# Altium PCB stm8.PcbDoc
Units mm, origin at the board's own origin, x right, y up, seen from the top; angles counter-clockwise.
Board outline 34 x 58 mm, 2 copper layers (Top Layer, Bottom Layer); 19 components, 22 nets, 79 pads, 12 vias.
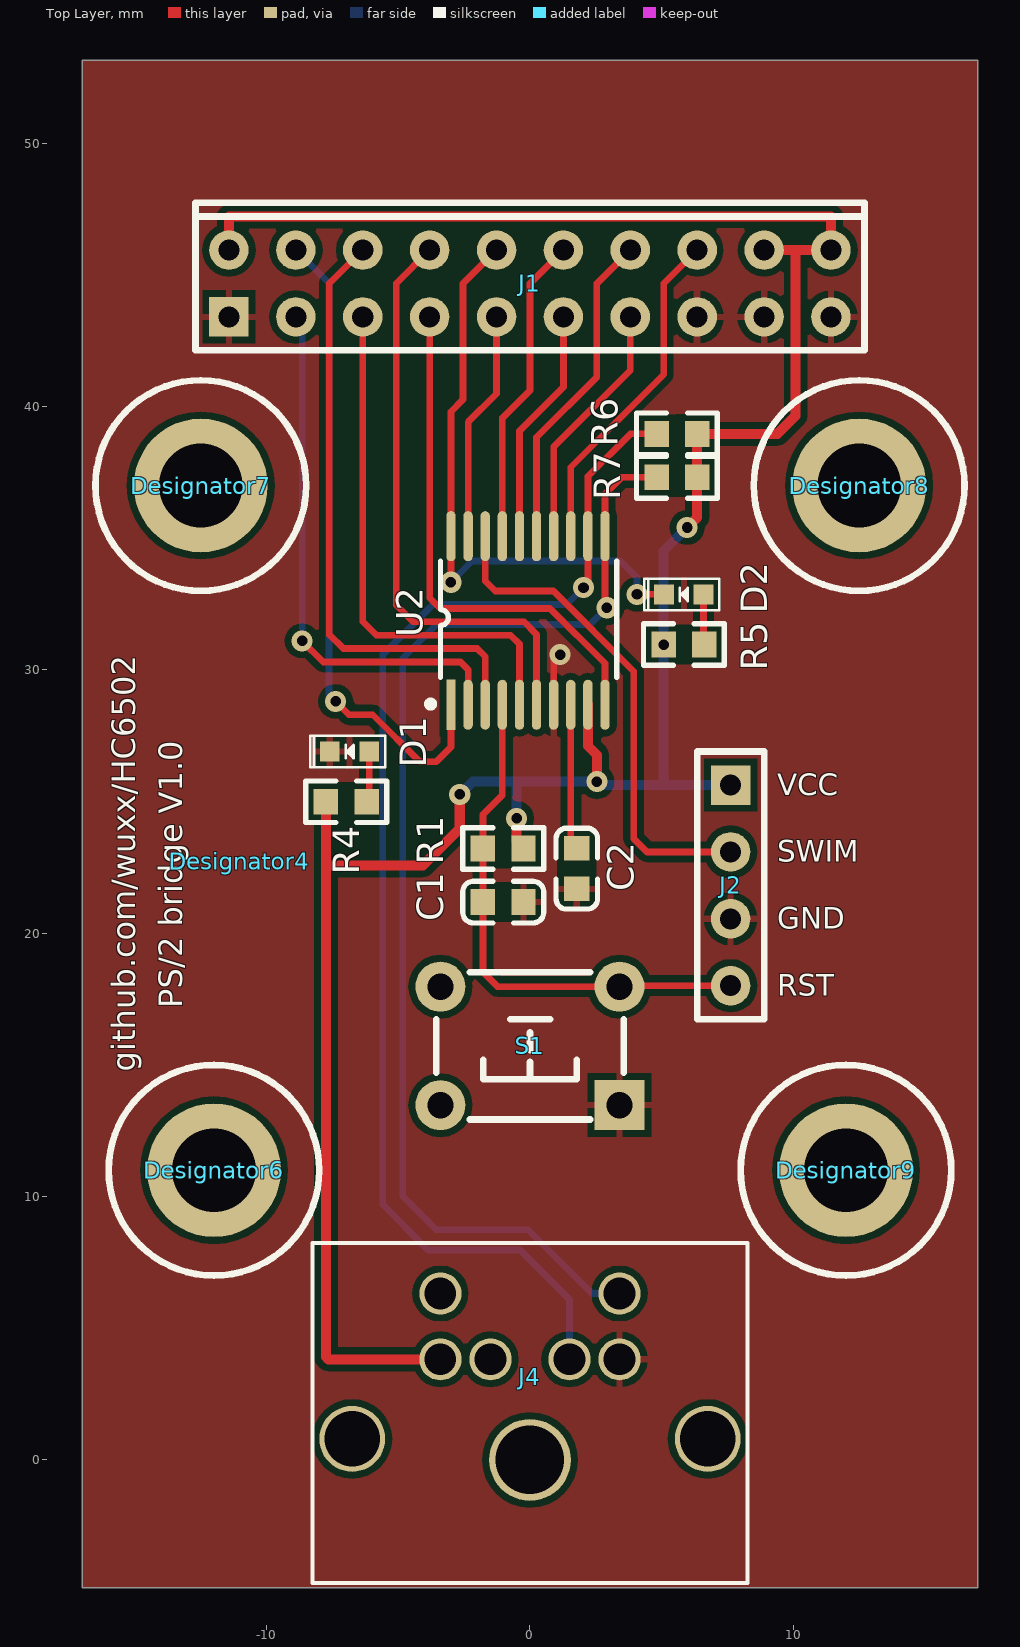
[diagram p0: Top Layer view]
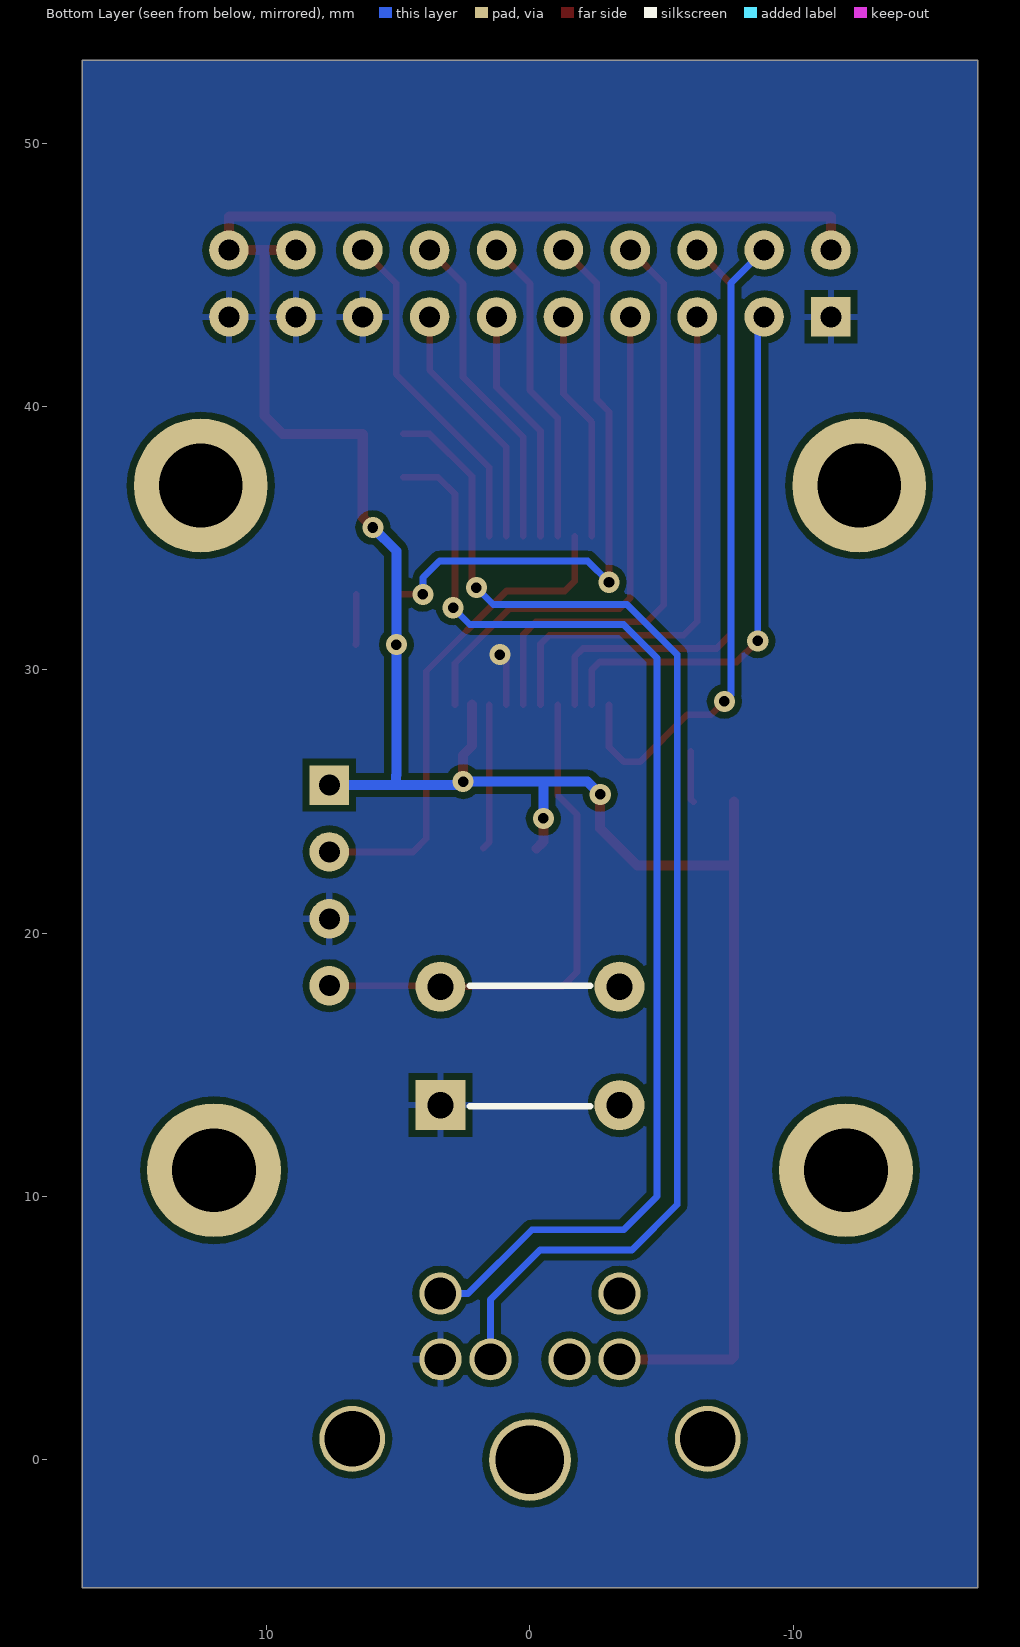
[diagram p1: Bottom Layer view, seen from below]
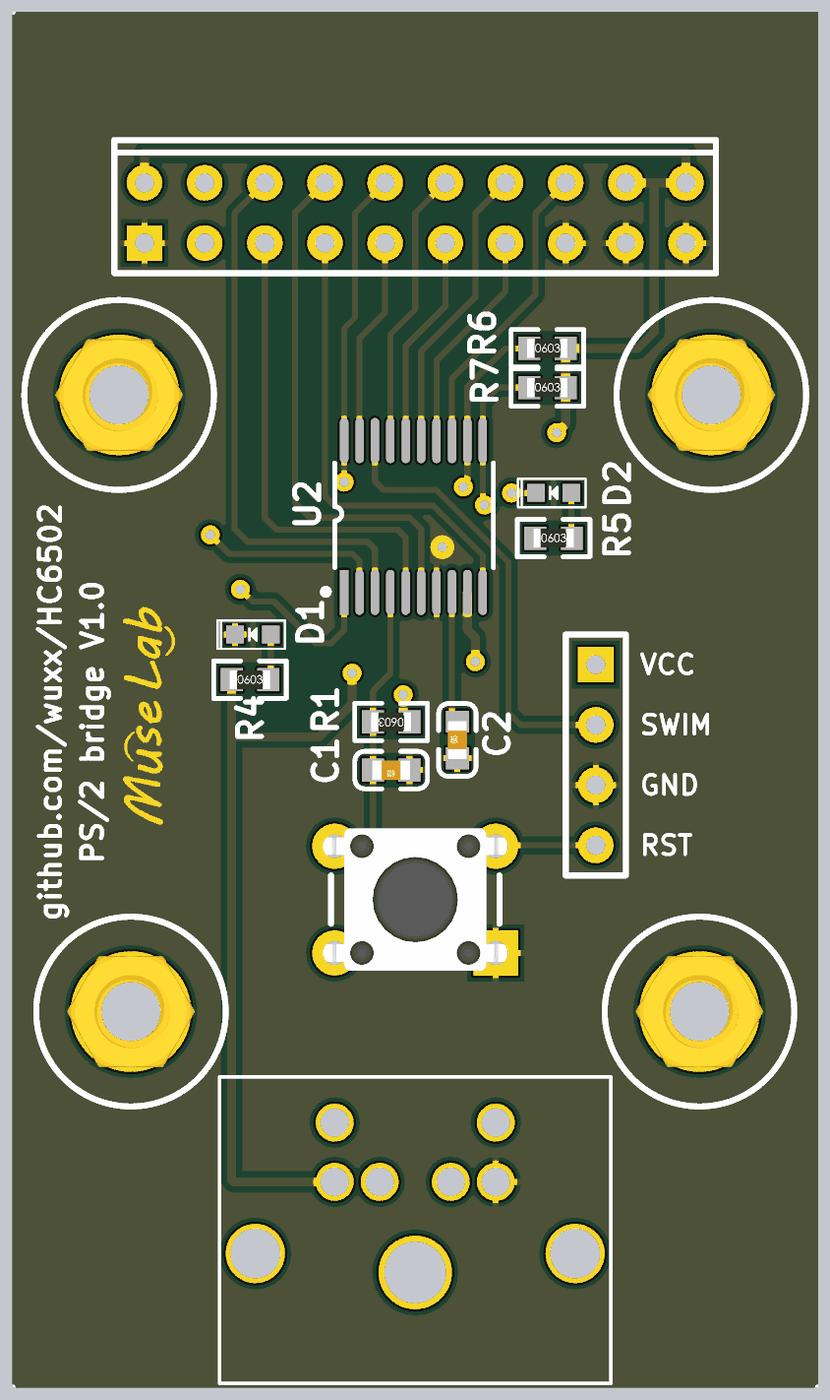
[diagram p2: 3D render of the assembled board from above, using the file's embedded part models]

## Layer stack, top to bottom
Top Solder: solder mask 0.0102, Solder Resist, Dk 3.5
Top Layer: signal copper 0.0356
Dielectric 1: dielectric 0.32, FR-4, Dk 4.8
Bottom Layer: signal copper 0.0356
Bottom Solder: solder mask 0.0102, Solder Resist, Dk 3.5

## Board outline
-17,-4.852 17,-4.852 17,53.148 -17,53.148

## Design rules (kind name [scope] priority, off if disabled: settings)
Clearance [All] p1: gap=0.254 ignorepadtopadclearanceinfootprint=FALSE except(0: Arc-Hole Track-Hole SMDPad-Hole THPad-Hole Via-Hole Fill-Hole Poly-Hole Region-Hole Text-Hole)
DiffPairsRouting [All] p1: maxlimit=0.254 minlimit=0.254 mostfreqgap=0.254 toplayer_minwidth=0.152 toplayer_maxwidth=0.381 toplayer_prefwidth=0.381 bottomlayer_minwidth=0.152 bottomlayer_maxwidth=0.381 bottomlayer_prefwidth=0.381 maxuncoupledlength=12.7
PolygonConnect [All] p1: thpad.connectstyle=Relief thpad.reliefconductorwidth=0.254 thpad.reliefentries=4 thpad.polygonreliefangle="90 Angle" thpad.airgapwidth=0.254 smdpad.connectstyle=Relief smdpad.reliefconductorwidth=0.254 smdpad.reliefentries=4 smdpad.polygonreliefangle="90 Angle" smdpad.airgapwidth=0.254 via.connectstyle=Direct via.reliefconductorwidth=0.254 via.reliefentries=4 via.polygonreliefangle="90 Angle" via.airgapwidth=0.254
RoutingVias [All] p1: holewidth=0.4 width=0.8 viastyle="Through Hole" minholewidth=0.4 minwidth=0.8 maxholewidth=0.4 maxwidth=0.8
SolderMaskExpansion [All] p1: expansion=0.102
Width [All] p1: maxlimit=2.54 minlimit=0.152 preferedwidth=0.254
29 further rules are at their usual default settings.

## Classes and differential pairs
component class stm8: C1 C2 D1 D2 J1 J2 J4 R1 R4 R5 R6 R7 S1 U2

## Components (designator, comment, footprint, x,y, rotation, side; value= is the part's Value field where it differs from the comment)
C1 "Cap" 0603_C -0.254,21.183 r180 top value=100nF
C2 "Cap" 0603_C 1.778,21.691 r90 top value=1uF
D1 "LED0" 0603_LED -6.85,26.898 r180 top
D2 "LED0" 0603_LED 5.842,32.867 r180 top
Designator4 "Comment" LOGO -11.049,22.733 r90 top
Designator6 "Comment" M3x4_L -12,11 r0 top
Designator7 "Comment" M3x4_L -12.5,37 r0 top
Designator8 "Comment" M3x4_L 12.5,37 r0 top
Designator9 "Comment" M3x4_L 12,11 r0 top
J1 "IDC20" IDC20 0,44.673 r0 top
J2 "Header 4" HEADER_4x1 7.62,25.628 r270 top
J4 "PS2" PS2 0,3.8 r180 top
R1 "Res2" 0603_R -0.254,23.215 r180 top value=1K
R4 "Res2" 0603_R -7.739,24.993 r0 top value=1K
R5 "Res2" 0603_R 5.08,30.962 r0 top value=1K
R6 "Res2" 0603_R 4.818,38.963 r0 top value=4.7K
R7 "Res2" 0603_R 4.818,37.312 r0 top value=4.7K
S1 "SW-PB" "TSW DIP-6*6*6" 0,15.722 r180 top
U2 "STM8S103F3P6" TSSOP20 -3,28.676 r90 top locked

## Footprints (in the part's own frame and the unit in brackets; to place one, negate y for a bottom-side part, rotate by r counter-clockwise, add the part's x,y. Pads: shape width x height; smd on the part's side, far side on the other; paste and mask are expansions set on the pad)
0603_C [mm]
  rect 0.93x0.98 smd: 1(-0.008,0) 2(1.532,0)
  silkscreen extent -0.77,-0.79 2.3,0.79, body extent -0.04,-0.4 1.56,0.4, height 0.3
0603_LED [mm]
  rect 0.75x0.75 smd: 1(-0.75,0) 2(0.75,0)
  silkscreen extent -1.35,-0.6 1.5,0.6
0603_R [mm]
  rect 0.93x0.98 smd: 1(-0.008,0) 2(1.532,0)
  silkscreen extent -0.77,-0.79 2.3,0.79, body extent -0.09,-0.4 1.61,0.4, height 0.56
HEADER_4x1 [mm]
  rect 1.5x1.5 hole 0.8: 1(0,0)
  round 1.5 hole 0.8: 2(2.54,0) 3(5.08,0) 4(7.62,0)
  silkscreen extent -1.27,-1.27 8.89,1.27
IDC20 [mm]
  rect 1.5x1.5 hole 0.8: 1(-11.43,-1.27)
  round 1.5 hole 0.8: 2(-11.43,1.27) 3(-8.89,-1.27) 4(-8.89,1.27) 5(-6.35,-1.27) 6(-6.35,1.27) 7(-3.81,-1.27) 8(-3.81,1.27) 9(-1.27,-1.27) 10(-1.27,1.27) 11(1.27,-1.27) 12(1.27,1.27) 13(3.81,-1.27) 14(3.81,1.27) 15(6.35,-1.27) 16(6.35,1.27) 17(8.89,-1.27) 18(8.89,1.27) 19(11.43,-1.27) 20(11.43,1.27)
  silkscreen extent -12.7,-2.54 12.7,3.07
LOGO [mm]
M3x4_L [mm] "M3铜柱，长：4mm"
  round 5.08 hole 3.175: 1(0,0)
  silkscreen extent -4,-4 4,4, body extent -2.7,-2.35 2.7,2.35, height 4.05
PS2 [mm]
  round 1.6 hole 1.2: 1(-1.5,-0.02) 2(1.5,-0.02) 3(-3.4,-0.02) 4(3.4,-0.02) 5(-3.4,-2.52) 6(3.4,-2.52)
  round 2.5 hole 2.1: 7(-6.75,3) 9(6.75,3)
  round 3.1 hole 2.6: 8(0,3.8)
  silkscreen extent -8.26,-4.44 8.25,8.48
TSSOP20 [mm] "20-pin, 4.40 mm body, 0.65 mm pitch"
  rect 1.9x0.356 smd: 1(0,0)
  oval 1.9x0.356 smd: 2(0,-0.65) 3(0,-1.3) 4(0,-1.95) 5(0,-2.6) 6(0,-3.25) 7(0,-3.9) 8(0,-4.55) 9(0,-5.2) 10(0,-5.85) 11(6.4,-5.85) 12(6.4,-5.2) 13(6.4,-4.55) 14(6.4,-3.9) 15(6.4,-3.25) 16(6.4,-2.6) 17(6.4,-1.95) 18(6.4,-1.3) 19(6.4,-0.65) 20(6.4,0)
  silkscreen extent -0.1,-6.3 5.45,0.9
"TSW DIP-6*6*6" [mm] "6*6*6mm"
  rect 1.9x1.9 hole 1: 1(-3.4,2.25)
  round 1.9 hole 1: 2(-3.4,-2.25) 3(3.4,-2.25) 4(3.4,2.25)
  silkscreen extent -3.56,-2.79 3.56,2.79, body extent -4.11,-3 4.11,3, height 5.95

## Part data
C1 C2: "Capacitor", LatestRevisionDate=17-Jul-2002, LatestRevisionNote="Re-released for DXP Platform.", PackageDescription="Radial Cap, Thru-Hole; 2 Leads; 0.3 in Pin Spacing", PackageReference=RAD-0.3, Published=8-Jun-2000, Publisher="Altium Limited"
D1 D2: "Typical INFRARED GaAs LED", LatestRevisionDate=08-Jul-2005, LatestRevisionNote="Mech Layer 1 removed.", PackageDescription="LED; 2 Leads", PackageReference=LED-0, Published=8-Jun-2000, Publisher="Altium Limited"
J2: "Header, 4-Pin", LatestRevisionDate=17-Jul-2002, LatestRevisionNote="Re-released for DXP Platform.", Publisher="Altium Limited"
R1 R4 R5 R6 R7: "Resistor", LatestRevisionDate=17-Jul-2002, LatestRevisionNote="Re-released for DXP Platform.", PackageDescription="Axial Device, Thru-Hole; 2 Leads; 0.4 in Pin Spacing", PackageReference=AXIAL-0.4, Published=8-Jun-2000, Publisher="Altium Limited"
S1: "Switch", LatestRevisionDate=17-Jul-2002, LatestRevisionNote="Re-released for DXP Platform.", PackageDescription="Switch; 2 Leads", PackageReference=SPST-2, Published=24-Mar-1999, Publisher="Altium Limited"
U2: "ST 8-bit  Microcontroller"

## Via types
v1: diameter 0.8, hole 0.4, Top Layer to Bottom Layer, 12 vias

## Nets (pads, with @x,y where several pads share a name; then routed paths per layer and width w, separated by ;. In a path a pad name is that pad's centre, name@x,y a point inside that pad or via, vN(x,y) a via of type N, cw(c..) or ccw(c..) an arc to the next point about the centre after c; other vN are vias at no path point)
5V: J1.2 J1.18 J1.20 J2.1 J4.4 R1.1 R4.1 R5.1 R6.2 R7.2 U2.9 | length 100.9
  Top Layer w0.254: R5.1@5.072,30.843 v1(5.072,30.962)
  Top Layer w0.381: J1.2 -11.43,47.218 11.43,47.218 J1.20 10.033,45.943 ; R4.1 -7.747,22.58 ; J4.4 -7.656,3.82 -7.747,3.911 -7.747,22.58 ; v1(-2.667,25.272) -2.667,23.977 -4.064,22.58 -7.747,22.58 ; v1(-0.508,24.358) -0.508,23.477 R1.1 ; U2.9 2.2,27.111 2.54,26.771 v1(2.54,25.755) ; v1(5.969,35.407) 6.35,35.788 R7.2 R6.2 9.398,38.963 10.085,39.65 10.085,45.891 10.033,45.943 ; J1.18 10.033,45.943
  Bottom Layer w0.381: v1(-2.667,25.272) -2.184,25.755 -0.508,25.755 ; v1(-0.508,24.358) -0.508,25.755 ; v1(5.969,35.407) 5.072,34.51 v1(5.072,30.962) 5.072,26.001 5.08,25.993 5.08,25.628 ; J2.1 5.08,25.628 ; -0.508,25.755 v1(2.54,25.755) 2.667,25.628 5.08,25.628
GND: C1.1 C2.1 D1.2 J1.1 J1.15 J1.17 J1.19 J2.3 J4.3 S1.1 U2.7 | length 2
  Top Layer w0.254: U2.7 0.9,30.338 v1(1.143,30.581)
NetC2_2: C2.2 U2.8 | length 5.5
  Top Layer w0.254: U2.8 1.55,23.451 C2.2
NetD1_1: D1.1 R4.2 | length 1.9
  Top Layer w0.254: R4.2 -6.1,25.1 D1.1
NetD2_1: D2.1 R5.2 | length 1.9
  Top Layer w0.254: D2.1 6.592,30.982 R5.2
NRST: C1.2 J2.4 R1.2 S1.2 U2.4 | length 20.1
  Top Layer w0.254: U2.4 -1.05,25.245 -1.786,24.509 R1.2 -1.786,22.174 C1.2 -1.786,18.524 -1.234,17.972 S1.2 3.436,18.008 J2.4
PA1: J1.5 U2.5 | length 20.2
  Top Layer w0.254: J1.5 -6.35,31.837 -5.831,31.318 -0.737,31.318 -0.4,30.981 U2.5
PA2: J1.8 U2.6 | length 22.5
  Top Layer w0.254: J1.8 -5.08,44.673 -5.08,32.461 -4.445,31.826 -0.229,31.826 0.25,31.347 U2.6
PA3: J1.7 U2.10 | length 19.9
  Top Layer w0.254: J1.7 -3.81,32.74 -3.404,32.334 0.767,32.334 2.85,30.251 U2.10
PB4: J4.1 R6.1 U2.12 | length 48
  Top Layer w0.254: v1(2.032,33.121) 2.2,33.289 U2.12 2.2,37.353 3.81,38.963 R6.1
  Bottom Layer w0.254: J4.1 1.5,6.094 -0.381,7.975 -3.872,7.975 -5.588,9.691 -5.588,30.581 -3.683,32.486 1.397,32.486 v1(2.032,33.121)
PB5: J4.5 R7.1 U2.11 | length 45.3
  Top Layer w0.254: v1(2.921,32.359) 2.85,32.43 U2.11 2.85,36.677 3.485,37.312 R7.1
  Bottom Layer w0.254: v1(2.921,32.359) 2.286,31.724 -3.556,31.724 -4.826,30.454 -4.826,10.007 -3.556,8.737 -0.065,8.737 2.352,6.32 J4.5
PC3: J1.16 U2.13 | length 12.9
  Top Layer w0.254: U2.13 1.55,37.693 5.08,41.223 5.08,44.673 J1.16
PC4: J1.13 U2.14 | length 9.5
  Top Layer w0.254: U2.14 0.9,38.466 3.81,41.376 J1.13
PC5: J1.14 U2.15 | length 12.3
  Top Layer w0.254: U2.15 0.25,38.832 2.54,41.122 2.54,44.673 J1.14
PC6: J1.11 U2.16 | length 9
  Top Layer w0.254: U2.16 -0.4,39.071 1.27,40.741 J1.11
PC7: J1.12 U2.17 | length 11.8
  Top Layer w0.254: U2.17 -1.05,39.564 0,40.614 0,44.673 J1.12
PD1: J2.2 U2.18 | length 19
  Top Layer w0.254: U2.18 -1.7,33.375 -1.319,32.994 0.889,32.994 3.937,29.946 3.937,23.596 4.445,23.088 J2.2
PD2: J1.9 U2.19 | length 8.8
  Top Layer w0.254: U2.19 -2.35,39.407 -1.27,40.487 J1.9
PD3: D2.2 J1.10 U2.20 | length 22.7
  Top Layer w0.254: v1(-3,33.327) U2.20 -3,39.804 -2.54,40.264 -2.54,44.673 J1.10 ; v1(4.064,32.867) D2.2
  Bottom Layer w0.254: v1(-3,33.327) -2.19,34.137 3.429,34.137 4.064,33.502 v1(4.064,32.867)
PD4: J1.4 U2.1 | length 24.9
  Top Layer w0.254: v1(-7.38,28.803) -6.872,28.295 -5.969,28.295 -4.191,26.517 -3.556,26.517 -3,27.073 U2.1
  Bottom Layer w0.254: J1.4 -7.634,44.687 -7.634,29.057 v1(-7.38,28.803)
PD5: J1.3 U2.2 | length 20.5
  Top Layer w0.254: v1(-8.65,31.103) -7.849,30.302 -2.642,30.302 -2.35,30.01 U2.2
  Bottom Layer w0.254: J1.3 -8.65,43.163 v1(-8.65,31.103)
PD6: J1.6 U2.3 | length 23.2
  Top Layer w0.254: J1.6 -7.62,44.673 -7.62,31.343 -7.087,30.81 -2.007,30.81 -1.7,30.503 U2.3
pads on no net: Designator6.1 Designator7.1 Designator8.1 Designator9.1 J4.2 J4.6 J4.7 J4.8 J4.9 S1.3 S1.4

## Polygon pours and split planes (outlines as drawn)
GND on Top Layer "GND_L01_P004" (solid, remove dead copper, pour order 4): -17,-4.852 17,-4.852 17,53.148 -17,53.148
GND on Bottom Layer "GND_L02_P006" (solid, remove dead copper, pour order 6): -17,-4.852 17,-4.852 17,53.148 -17,53.148

## Silkscreen, mask and mechanical layers (free items; w line width, h text height)
Top Overlay:
  text "VCC" at 9.398,25.247 h0.81
  text "SWIM" at 9.398,22.707 h0.81
  text "GND" at 9.398,20.167 h0.81
  text "RST" at 9.398,17.627 h0.81
  text "PS/2 bridge V1.0" at -13.208,17.145 h0.89 r90
  text "github.com/wuxx/HC6502" at -14.986,14.732 h0.89 r90
Mechanical 1:
  the board outline again, w0.152

## Dimensions
-17,-4.852 to 17,-4.852 on Top Overlay
-17,53.148 to -17,-4.852 on Top Overlay